# EAGLE board Qwiic_I2C_Capacitor-Panel (EAGLE 9.4.2), part 1 of 2
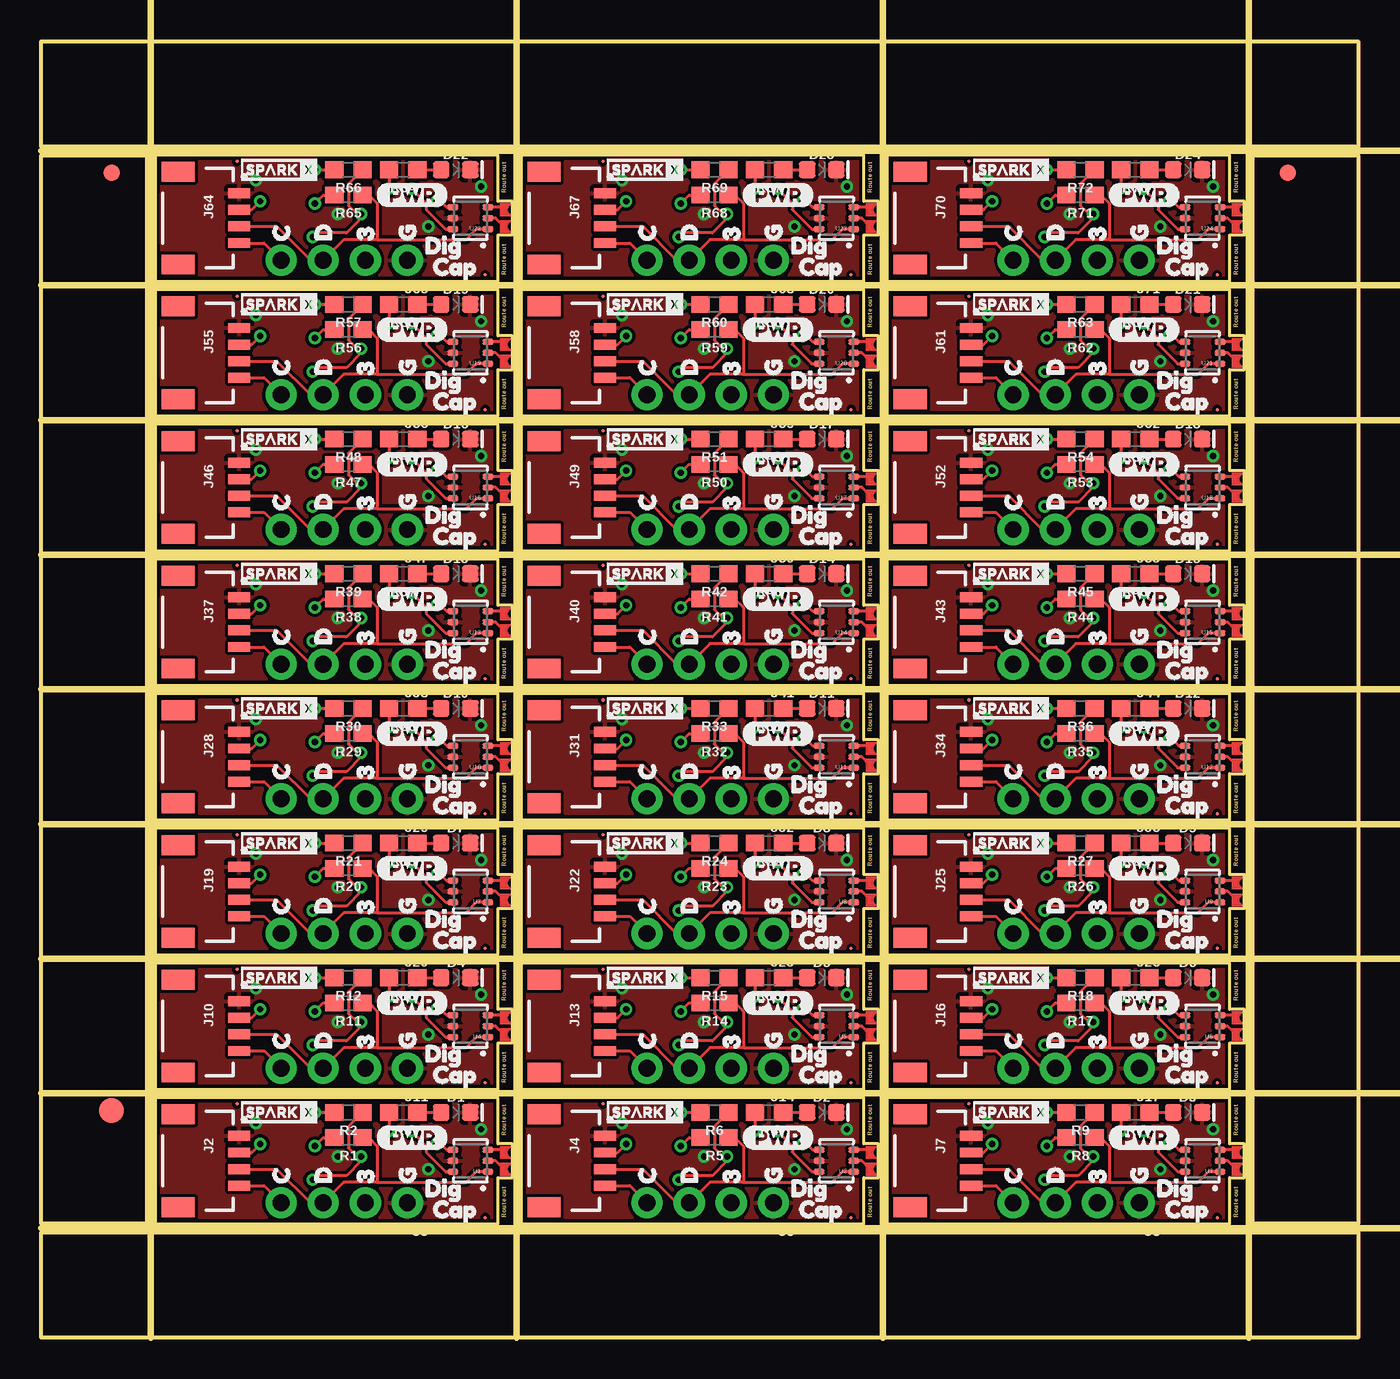
[diagram p0: board, top side]
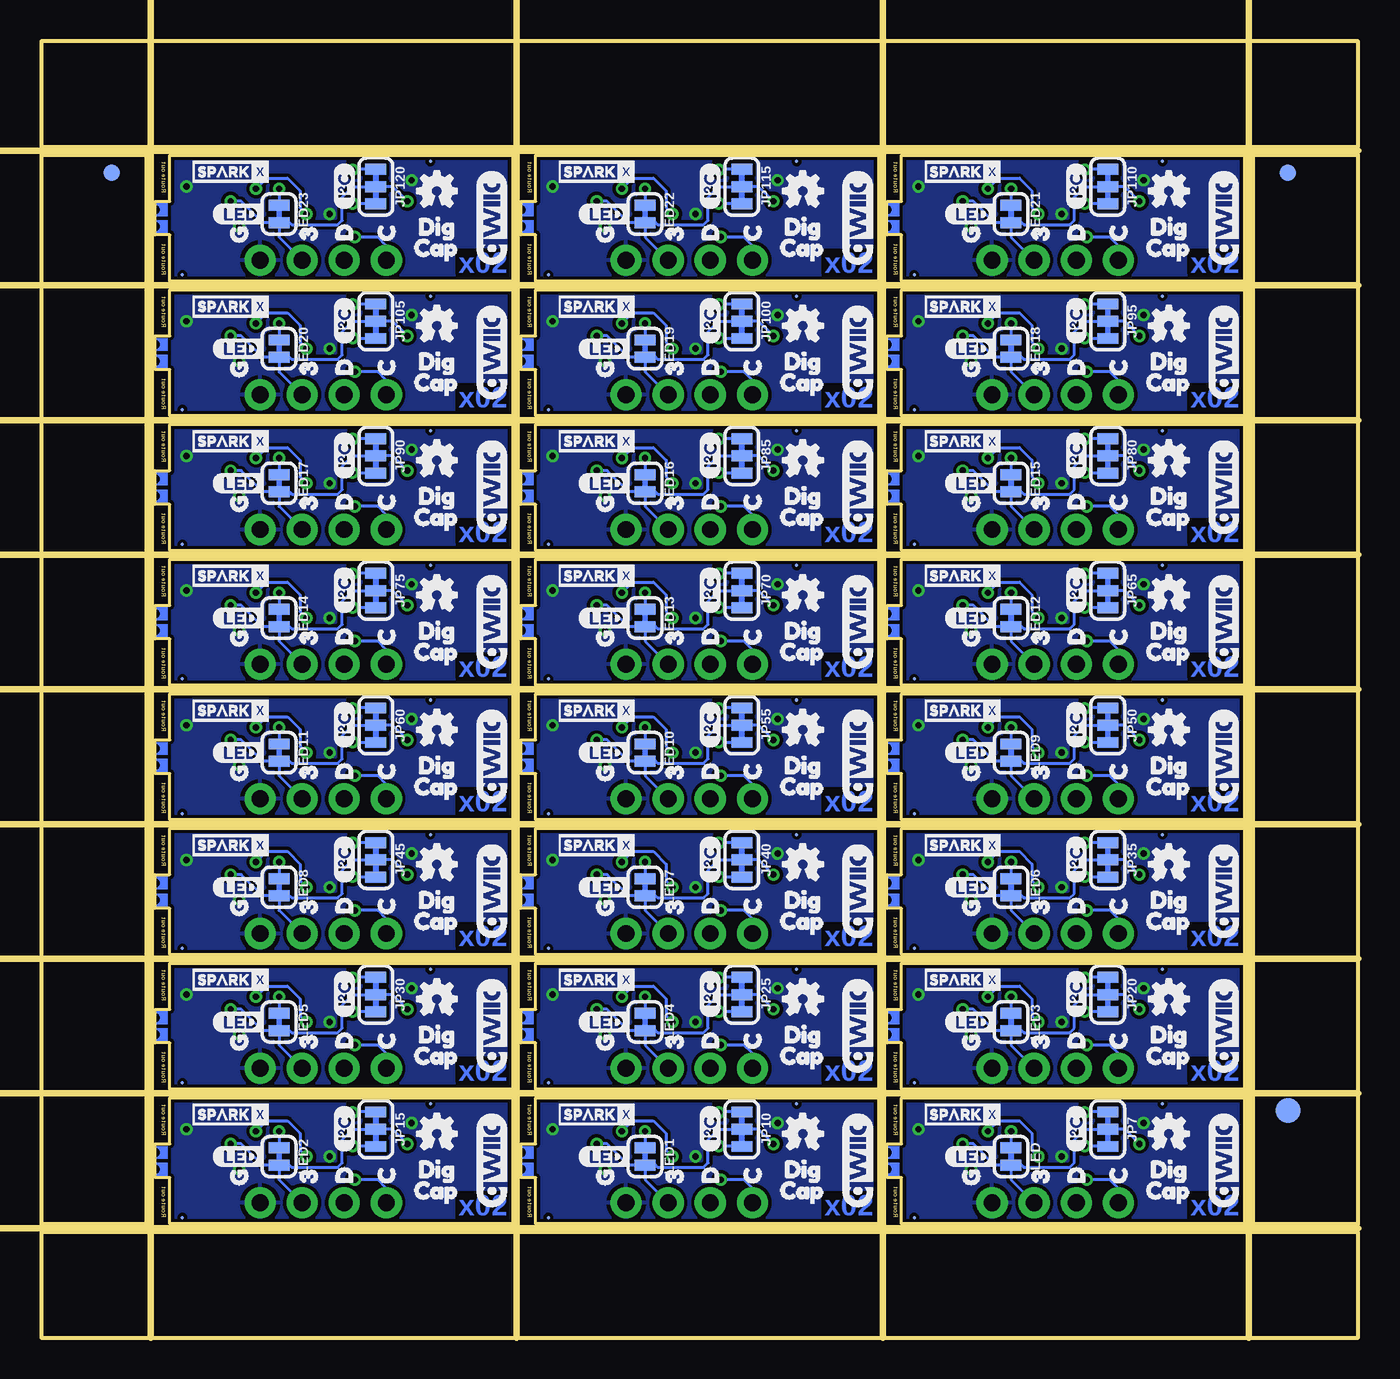
[diagram p1: board, bottom side, seen from below]

Size 79.5 x 78.23 mm. Coordinates in mm from the lower left corner, seen from the top.
Outline: 6.86,6.86 27.56,6.86 27.56,9.65 28.45,9.65 28.45,11.68 27.56,11.68 27.56,14.48 6.86,14.48 6.86,6.86
Outline: 28.96,6.86 49.66,6.86 49.66,9.65 50.55,9.65 50.55,11.68 49.66,11.68 49.66,14.48 28.96,14.48 28.96,6.86
Outline: 51.05,6.86 71.76,6.86 71.76,9.65 72.64,9.65 72.64,11.68 71.76,11.68 71.76,14.48 51.05,14.48 51.05,6.86
Outline: 6.86,14.99 27.56,14.99 27.56,17.78 28.45,17.78 28.45,19.81 27.56,19.81 27.56,22.61 6.86,22.61 6.86,14.99
Outline: 28.96,14.99 49.66,14.99 49.66,17.78 50.55,17.78 50.55,19.81 49.66,19.81 49.66,22.61 28.96,22.61 28.96,14.99
Outline: 51.05,14.99 71.76,14.99 71.76,17.78 72.64,17.78 72.64,19.81 71.76,19.81 71.76,22.61 51.05,22.61 51.05,14.99
Outline: 6.86,23.11 27.56,23.11 27.56,25.91 28.45,25.91 28.45,27.94 27.56,27.94 27.56,30.73 6.86,30.73 6.86,23.11
Outline: 28.96,23.11 49.66,23.11 49.66,25.91 50.55,25.91 50.55,27.94 49.66,27.94 49.66,30.73 28.96,30.73 28.96,23.11
Outline: 51.05,23.11 71.76,23.11 71.76,25.91 72.64,25.91 72.64,27.94 71.76,27.94 71.76,30.73 51.05,30.73 51.05,23.11
Outline: 6.86,31.24 27.56,31.24 27.56,34.04 28.45,34.04 28.45,36.07 27.56,36.07 27.56,38.86 6.86,38.86 6.86,31.24
Outline: 28.96,31.24 49.66,31.24 49.66,34.04 50.55,34.04 50.55,36.07 49.66,36.07 49.66,38.86 28.96,38.86 28.96,31.24
Outline: 51.05,31.24 71.76,31.24 71.76,34.04 72.64,34.04 72.64,36.07 71.76,36.07 71.76,38.86 51.05,38.86 51.05,31.24
Outline: 6.86,39.37 27.56,39.37 27.56,42.16 28.45,42.16 28.45,44.2 27.56,44.2 27.56,46.99 6.86,46.99 6.86,39.37
Outline: 28.96,39.37 49.66,39.37 49.66,42.16 50.55,42.16 50.55,44.2 49.66,44.2 49.66,46.99 28.96,46.99 28.96,39.37
Outline: 51.05,39.37 71.76,39.37 71.76,42.16 72.64,42.16 72.64,44.2 71.76,44.2 71.76,46.99 51.05,46.99 51.05,39.37
Outline: 6.86,47.5 27.56,47.5 27.56,50.29 28.45,50.29 28.45,52.32 27.56,52.32 27.56,55.12 6.86,55.12 6.86,47.5
Outline: 28.96,47.5 49.66,47.5 49.66,50.29 50.55,50.29 50.55,52.32 49.66,52.32 49.66,55.12 28.96,55.12 28.96,47.5
Outline: 51.05,47.5 71.76,47.5 71.76,50.29 72.64,50.29 72.64,52.32 71.76,52.32 71.76,55.12 51.05,55.12 51.05,47.5
Outline: 6.86,55.63 27.56,55.63 27.56,58.42 28.45,58.42 28.45,60.45 27.56,60.45 27.56,63.25 6.86,63.25 6.86,55.63
Outline: 28.96,55.63 49.66,55.63 49.66,58.42 50.55,58.42 50.55,60.45 49.66,60.45 49.66,63.25 28.96,63.25 28.96,55.63
Outline: 51.05,55.63 71.76,55.63 71.76,58.42 72.64,58.42 72.64,60.45 71.76,60.45 71.76,63.25 51.05,63.25 51.05,55.63
Outline: 6.86,63.75 27.56,63.75 27.56,66.55 28.45,66.55 28.45,68.58 27.56,68.58 27.56,71.37 6.86,71.37 6.86,63.75
Outline: 28.96,63.75 49.66,63.75 49.66,66.55 50.55,66.55 50.55,68.58 49.66,68.58 49.66,71.37 28.96,71.37 28.96,63.75
Outline: 51.05,63.75 71.76,63.75 71.76,66.55 72.64,66.55 72.64,68.58 71.76,68.58 71.76,71.37 51.05,71.37 51.05,63.75
Outline: 0,6.35 79.5,6.35 79.5,0 0,0 0,6.35
Outline: 73.15,71.37 79.5,71.37 79.5,6.86 73.15,6.86 73.15,71.37
Outline: 0,78.23 79.5,78.23 79.5,71.88 0,71.88 0,78.23
Outline: 0,71.37 6.35,71.37 6.35,6.86 0,6.86 0,71.37
Copper layers (1*16): Top 0.035mm / dielectric 1.5mm / Bottom 0.035mm
Design rules "Qwiic_I2C_Capacitor": minimum track width 7mil, minimum drill 15mil, track to track 7mil, track to pad 7mil, pad to pad 7mil, via to via 7mil, smd to smd 7mil, copper to edge 7mil, drill to drill 7mil, minimum pad ring 0mil, minimum via ring 7mil, stop-mask expansion 4mil, vias tented up to drill 25mil, thermal gap 10mil
Milling: 13 lines

## Footprints (pad centres in the part's own frame; a part is rotated, then mirrored left to right if it is on the bottom)
LED-0603 = smd 1 x 1: A -0.877,0; C 0.877,0
FIDUCIAL-1X2 = smd 1 x 1: 1 0,0
FIDUCIAL-1.5X3 = smd 1.5 x 1.5: 1 0,0
0603_CASTELLATED = drill 0.559 pad 0.559: 1 -0.508,0; 2 0.508,0
JST04_1MM_RA = smd 0.6 x 1.35: 1 -1.5,0; 2 -0.5,0; 3 0.5,0; 4 1.5,0 | smd 1.2 x 2: NC1 2.8,-3.675; NC2 -2.8,-3.675
1X04_NO_SILK = drill 1.016 pad 1.88: 1 0,0; 2 2.54,0; 3 5.08,0; 4 7.62,0
FIDUCIAL-0.2MM = smd 0.2 x 0.2: 1 0,0
SMT-JUMPER_3_2-NC_TRACE_SILK = smd 0.66 x 1.27: 1 -1.041,0; 2 0,0; 3 1.041,0
SMT-JUMPER_2_NC_TRACE_SILK = smd 0.66 x 1.27: 1 -0.521,0; 2 0.521,0
0603 = smd 1.1 x 1: 1 -0.85,0; 2 0.85,0
DFN6 = smd 0.66 x 0.356: 1 -1.054,0.66; 2 -1.054,0; 3 -1.054,-0.66; 4 1.054,-0.66; 5 1.054,0; 6 1.054,0.66

## Placement (x,y rotation side)
D1  RED  [LED-0603]  25.02,13.59 0 top
D2  RED  [LED-0603]  47.12,13.59 0 top
D3  RED  [LED-0603]  69.22,13.59 0 top
D4  RED  [LED-0603]  25.02,21.72 0 top
D5  RED  [LED-0603]  47.12,21.72 0 top
D6  RED  [LED-0603]  69.22,21.72 0 top
D7  RED  [LED-0603]  25.02,29.84 0 top
D8  RED  [LED-0603]  47.12,29.84 0 top
D9  RED  [LED-0603]  69.22,29.84 0 top
D10  RED  [LED-0603]  25.02,37.97 0 top
D11  RED  [LED-0603]  47.12,37.97 0 top
D12  RED  [LED-0603]  69.22,37.97 0 top
D13  RED  [LED-0603]  25.02,46.1 0 top
D14  RED  [LED-0603]  47.12,46.1 0 top
D15  RED  [LED-0603]  69.22,46.1 0 top
D16  RED  [LED-0603]  25.02,54.23 0 top
D17  RED  [LED-0603]  47.12,54.23 0 top
D18  RED  [LED-0603]  69.22,54.23 0 top
D19  RED  [LED-0603]  25.02,62.36 0 top
D20  RED  [LED-0603]  47.12,62.36 0 top
D21  RED  [LED-0603]  69.22,62.36 0 top
D22  RED  [LED-0603]  25.02,70.48 0 top
D23  RED  [LED-0603]  47.12,70.48 0 top
D24  RED  [LED-0603]  69.22,70.48 0 top
E$1  [FIDUCIAL-1X2]  4.23,70.29 0 top
E$2  [FIDUCIAL-1X2]  4.23,70.29 0 bottom
E$3  [FIDUCIAL-1X2]  75.27,70.29 0 top
E$4  [FIDUCIAL-1X2]  75.27,70.29 0 bottom
E$5  [FIDUCIAL-1.5X3]  4.23,13.72 0 top
E$6  [FIDUCIAL-1.5X3]  4.23,13.72 0 bottom
J1  CONN_02_0603  [0603_CASTELLATED]  28.45,10.67 90 top
J2  QWIIC_RIGHT_ANGLE  [JST04_1MM_RA]  11.94,10.67 270 top
J3  PTH  [1X04_NO_SILK]  22.1,8.13 180 top
J4  QWIIC_RIGHT_ANGLE  [JST04_1MM_RA]  34.04,10.67 270 top
J5  PTH  [1X04_NO_SILK]  44.2,8.13 180 top
J6  CONN_02_0603  [0603_CASTELLATED]  50.55,10.67 90 top
J7  QWIIC_RIGHT_ANGLE  [JST04_1MM_RA]  56.13,10.67 270 top
J8  PTH  [1X04_NO_SILK]  66.29,8.13 180 top
J9  CONN_02_0603  [0603_CASTELLATED]  72.64,10.67 90 top
J10  QWIIC_RIGHT_ANGLE  [JST04_1MM_RA]  11.94,18.8 270 top
J11  PTH  [1X04_NO_SILK]  22.1,16.26 180 top
J12  CONN_02_0603  [0603_CASTELLATED]  28.45,18.8 90 top
J13  QWIIC_RIGHT_ANGLE  [JST04_1MM_RA]  34.04,18.8 270 top
J14  PTH  [1X04_NO_SILK]  44.2,16.26 180 top
J15  CONN_02_0603  [0603_CASTELLATED]  50.55,18.8 90 top
J16  QWIIC_RIGHT_ANGLE  [JST04_1MM_RA]  56.13,18.8 270 top
J17  PTH  [1X04_NO_SILK]  66.29,16.26 180 top
J18  CONN_02_0603  [0603_CASTELLATED]  72.64,18.8 90 top
J19  QWIIC_RIGHT_ANGLE  [JST04_1MM_RA]  11.94,26.92 270 top
J20  PTH  [1X04_NO_SILK]  22.1,24.38 180 top
J21  CONN_02_0603  [0603_CASTELLATED]  28.45,26.92 90 top
J22  QWIIC_RIGHT_ANGLE  [JST04_1MM_RA]  34.04,26.92 270 top
J23  PTH  [1X04_NO_SILK]  44.2,24.38 180 top
J24  CONN_02_0603  [0603_CASTELLATED]  50.55,26.92 90 top
J25  QWIIC_RIGHT_ANGLE  [JST04_1MM_RA]  56.13,26.92 270 top
J26  PTH  [1X04_NO_SILK]  66.29,24.38 180 top
J27  CONN_02_0603  [0603_CASTELLATED]  72.64,26.92 90 top
J28  QWIIC_RIGHT_ANGLE  [JST04_1MM_RA]  11.94,35.05 270 top
J29  PTH  [1X04_NO_SILK]  22.1,32.51 180 top
J30  CONN_02_0603  [0603_CASTELLATED]  28.45,35.05 90 top
J31  QWIIC_RIGHT_ANGLE  [JST04_1MM_RA]  34.04,35.05 270 top
J32  PTH  [1X04_NO_SILK]  44.2,32.51 180 top
J33  CONN_02_0603  [0603_CASTELLATED]  50.55,35.05 90 top
J34  QWIIC_RIGHT_ANGLE  [JST04_1MM_RA]  56.13,35.05 270 top
J35  PTH  [1X04_NO_SILK]  66.29,32.51 180 top
J36  CONN_02_0603  [0603_CASTELLATED]  72.64,35.05 90 top
J37  QWIIC_RIGHT_ANGLE  [JST04_1MM_RA]  11.94,43.18 270 top
J38  PTH  [1X04_NO_SILK]  22.1,40.64 180 top
J39  CONN_02_0603  [0603_CASTELLATED]  28.45,43.18 90 top
J40  QWIIC_RIGHT_ANGLE  [JST04_1MM_RA]  34.04,43.18 270 top
J41  PTH  [1X04_NO_SILK]  44.2,40.64 180 top
J42  CONN_02_0603  [0603_CASTELLATED]  50.55,43.18 90 top
J43  QWIIC_RIGHT_ANGLE  [JST04_1MM_RA]  56.13,43.18 270 top
J44  PTH  [1X04_NO_SILK]  66.29,40.64 180 top
J45  CONN_02_0603  [0603_CASTELLATED]  72.64,43.18 90 top
J46  QWIIC_RIGHT_ANGLE  [JST04_1MM_RA]  11.94,51.31 270 top
J47  PTH  [1X04_NO_SILK]  22.1,48.77 180 top
J48  CONN_02_0603  [0603_CASTELLATED]  28.45,51.31 90 top
J49  QWIIC_RIGHT_ANGLE  [JST04_1MM_RA]  34.04,51.31 270 top
J50  PTH  [1X04_NO_SILK]  44.2,48.77 180 top
J51  CONN_02_0603  [0603_CASTELLATED]  50.55,51.31 90 top
J52  QWIIC_RIGHT_ANGLE  [JST04_1MM_RA]  56.13,51.31 270 top
J53  PTH  [1X04_NO_SILK]  66.29,48.77 180 top
J54  CONN_02_0603  [0603_CASTELLATED]  72.64,51.31 90 top
J55  QWIIC_RIGHT_ANGLE  [JST04_1MM_RA]  11.94,59.44 270 top
J56  PTH  [1X04_NO_SILK]  22.1,56.9 180 top
J57  CONN_02_0603  [0603_CASTELLATED]  28.45,59.44 90 top
J58  QWIIC_RIGHT_ANGLE  [JST04_1MM_RA]  34.04,59.44 270 top
J59  PTH  [1X04_NO_SILK]  44.2,56.9 180 top
J60  CONN_02_0603  [0603_CASTELLATED]  50.55,59.44 90 top
J61  QWIIC_RIGHT_ANGLE  [JST04_1MM_RA]  56.13,59.44 270 top
J62  PTH  [1X04_NO_SILK]  66.29,56.9 180 top
J63  CONN_02_0603  [0603_CASTELLATED]  72.64,59.44 90 top
J64  QWIIC_RIGHT_ANGLE  [JST04_1MM_RA]  11.94,67.56 270 top
J65  PTH  [1X04_NO_SILK]  22.1,65.02 180 top
J66  CONN_02_0603  [0603_CASTELLATED]  28.45,67.56 90 top
J67  QWIIC_RIGHT_ANGLE  [JST04_1MM_RA]  34.04,67.56 270 top
J68  PTH  [1X04_NO_SILK]  44.2,65.02 180 top
J69  CONN_02_0603  [0603_CASTELLATED]  50.55,67.56 90 top
J70  QWIIC_RIGHT_ANGLE  [JST04_1MM_RA]  56.13,67.56 270 top
J71  PTH  [1X04_NO_SILK]  66.29,65.02 180 top
J72  CONN_02_0603  [0603_CASTELLATED]  72.64,67.56 90 top
JP1  FIDUCIAL0.2MM  [FIDUCIAL-0.2MM]  11.81,14.1 0 bottom
JP2  FIDUCIAL0.2MM  [FIDUCIAL-0.2MM]  26.8,7.24 0 top
JP3  FIDUCIAL0.2MM  [FIDUCIAL-0.2MM]  48.89,7.24 0 top
JP4  FIDUCIAL0.2MM  [FIDUCIAL-0.2MM]  33.91,14.1 0 top
JP5  FIDUCIAL0.2MM  [FIDUCIAL-0.2MM]  26.8,7.24 0 bottom
JP6  FIDUCIAL0.2MM  [FIDUCIAL-0.2MM]  11.81,14.1 0 top
JP7  JUMPER-SMT_3_2-NC_TRACE_SILK  [SMT-JUMPER_3_2-NC_TRACE_SILK]  15.11,12.57 270 bottom
JP8  FIDUCIAL0.2MM  [FIDUCIAL-0.2MM]  33.91,14.1 0 bottom
JP9  FIDUCIAL0.2MM  [FIDUCIAL-0.2MM]  48.89,7.24 0 bottom
JP10  JUMPER-SMT_3_2-NC_TRACE_SILK  [SMT-JUMPER_3_2-NC_TRACE_SILK]  37.21,12.57 270 bottom
JP11  FIDUCIAL0.2MM  [FIDUCIAL-0.2MM]  70.99,7.24 0 top
JP12  FIDUCIAL0.2MM  [FIDUCIAL-0.2MM]  56.01,14.1 0 top
JP13  FIDUCIAL0.2MM  [FIDUCIAL-0.2MM]  56.01,14.1 0 bottom
JP14  FIDUCIAL0.2MM  [FIDUCIAL-0.2MM]  70.99,7.24 0 bottom
JP15  JUMPER-SMT_3_2-NC_TRACE_SILK  [SMT-JUMPER_3_2-NC_TRACE_SILK]  59.31,12.57 270 bottom
JP16  FIDUCIAL0.2MM  [FIDUCIAL-0.2MM]  26.8,15.37 0 top
JP17  FIDUCIAL0.2MM  [FIDUCIAL-0.2MM]  11.81,22.23 0 top
JP18  FIDUCIAL0.2MM  [FIDUCIAL-0.2MM]  11.81,22.23 0 bottom
JP19  FIDUCIAL0.2MM  [FIDUCIAL-0.2MM]  26.8,15.37 0 bottom
JP20  JUMPER-SMT_3_2-NC_TRACE_SILK  [SMT-JUMPER_3_2-NC_TRACE_SILK]  15.11,20.7 270 bottom
JP21  FIDUCIAL0.2MM  [FIDUCIAL-0.2MM]  48.89,15.37 0 top
JP22  FIDUCIAL0.2MM  [FIDUCIAL-0.2MM]  33.91,22.23 0 top
JP23  FIDUCIAL0.2MM  [FIDUCIAL-0.2MM]  33.91,22.23 0 bottom
JP24  FIDUCIAL0.2MM  [FIDUCIAL-0.2MM]  48.89,15.37 0 bottom
JP25  JUMPER-SMT_3_2-NC_TRACE_SILK  [SMT-JUMPER_3_2-NC_TRACE_SILK]  37.21,20.7 270 bottom
JP26  FIDUCIAL0.2MM  [FIDUCIAL-0.2MM]  70.99,15.37 0 top
JP27  FIDUCIAL0.2MM  [FIDUCIAL-0.2MM]  56.01,22.23 0 top
JP28  FIDUCIAL0.2MM  [FIDUCIAL-0.2MM]  56.01,22.23 0 bottom
JP29  FIDUCIAL0.2MM  [FIDUCIAL-0.2MM]  70.99,15.37 0 bottom
JP30  JUMPER-SMT_3_2-NC_TRACE_SILK  [SMT-JUMPER_3_2-NC_TRACE_SILK]  59.31,20.7 270 bottom
JP31  FIDUCIAL0.2MM  [FIDUCIAL-0.2MM]  26.8,23.5 0 top
JP32  FIDUCIAL0.2MM  [FIDUCIAL-0.2MM]  11.81,30.35 0 top
JP33  FIDUCIAL0.2MM  [FIDUCIAL-0.2MM]  11.81,30.35 0 bottom
JP34  FIDUCIAL0.2MM  [FIDUCIAL-0.2MM]  26.8,23.5 0 bottom
JP35  JUMPER-SMT_3_2-NC_TRACE_SILK  [SMT-JUMPER_3_2-NC_TRACE_SILK]  15.11,28.83 270 bottom
JP36  FIDUCIAL0.2MM  [FIDUCIAL-0.2MM]  48.89,23.5 0 top
JP37  FIDUCIAL0.2MM  [FIDUCIAL-0.2MM]  33.91,30.35 0 top
JP38  FIDUCIAL0.2MM  [FIDUCIAL-0.2MM]  33.91,30.35 0 bottom
JP39  FIDUCIAL0.2MM  [FIDUCIAL-0.2MM]  48.89,23.5 0 bottom
JP40  JUMPER-SMT_3_2-NC_TRACE_SILK  [SMT-JUMPER_3_2-NC_TRACE_SILK]  37.21,28.83 270 bottom
JP41  FIDUCIAL0.2MM  [FIDUCIAL-0.2MM]  70.99,23.5 0 top
JP42  FIDUCIAL0.2MM  [FIDUCIAL-0.2MM]  56.01,30.35 0 top
JP43  FIDUCIAL0.2MM  [FIDUCIAL-0.2MM]  56.01,30.35 0 bottom
JP44  FIDUCIAL0.2MM  [FIDUCIAL-0.2MM]  70.99,23.5 0 bottom
JP45  JUMPER-SMT_3_2-NC_TRACE_SILK  [SMT-JUMPER_3_2-NC_TRACE_SILK]  59.31,28.83 270 bottom
JP46  FIDUCIAL0.2MM  [FIDUCIAL-0.2MM]  26.8,31.62 0 top
JP47  FIDUCIAL0.2MM  [FIDUCIAL-0.2MM]  11.81,38.48 0 top
JP48  FIDUCIAL0.2MM  [FIDUCIAL-0.2MM]  11.81,38.48 0 bottom
JP49  FIDUCIAL0.2MM  [FIDUCIAL-0.2MM]  26.8,31.62 0 bottom
JP50  JUMPER-SMT_3_2-NC_TRACE_SILK  [SMT-JUMPER_3_2-NC_TRACE_SILK]  15.11,36.96 270 bottom
JP51  FIDUCIAL0.2MM  [FIDUCIAL-0.2MM]  48.89,31.62 0 top
JP52  FIDUCIAL0.2MM  [FIDUCIAL-0.2MM]  33.91,38.48 0 top
JP53  FIDUCIAL0.2MM  [FIDUCIAL-0.2MM]  33.91,38.48 0 bottom
JP54  FIDUCIAL0.2MM  [FIDUCIAL-0.2MM]  48.89,31.62 0 bottom
JP55  JUMPER-SMT_3_2-NC_TRACE_SILK  [SMT-JUMPER_3_2-NC_TRACE_SILK]  37.21,36.96 270 bottom
JP56  FIDUCIAL0.2MM  [FIDUCIAL-0.2MM]  70.99,31.62 0 top
JP57  FIDUCIAL0.2MM  [FIDUCIAL-0.2MM]  56.01,38.48 0 top
JP58  FIDUCIAL0.2MM  [FIDUCIAL-0.2MM]  56.01,38.48 0 bottom
JP59  FIDUCIAL0.2MM  [FIDUCIAL-0.2MM]  70.99,31.62 0 bottom
JP60  JUMPER-SMT_3_2-NC_TRACE_SILK  [SMT-JUMPER_3_2-NC_TRACE_SILK]  59.31,36.96 270 bottom
JP61  FIDUCIAL0.2MM  [FIDUCIAL-0.2MM]  26.8,39.75 0 top
JP62  FIDUCIAL0.2MM  [FIDUCIAL-0.2MM]  11.81,46.61 0 top
JP63  FIDUCIAL0.2MM  [FIDUCIAL-0.2MM]  11.81,46.61 0 bottom
JP64  FIDUCIAL0.2MM  [FIDUCIAL-0.2MM]  26.8,39.75 0 bottom
JP65  JUMPER-SMT_3_2-NC_TRACE_SILK  [SMT-JUMPER_3_2-NC_TRACE_SILK]  15.11,45.08 270 bottom
JP66  FIDUCIAL0.2MM  [FIDUCIAL-0.2MM]  48.89,39.75 0 top
JP67  FIDUCIAL0.2MM  [FIDUCIAL-0.2MM]  33.91,46.61 0 top
JP68  FIDUCIAL0.2MM  [FIDUCIAL-0.2MM]  33.91,46.61 0 bottom
JP69  FIDUCIAL0.2MM  [FIDUCIAL-0.2MM]  48.89,39.75 0 bottom
JP70  JUMPER-SMT_3_2-NC_TRACE_SILK  [SMT-JUMPER_3_2-NC_TRACE_SILK]  37.21,45.08 270 bottom
JP71  FIDUCIAL0.2MM  [FIDUCIAL-0.2MM]  70.99,39.75 0 top
JP72  FIDUCIAL0.2MM  [FIDUCIAL-0.2MM]  56.01,46.61 0 top
JP73  FIDUCIAL0.2MM  [FIDUCIAL-0.2MM]  56.01,46.61 0 bottom
JP74  FIDUCIAL0.2MM  [FIDUCIAL-0.2MM]  70.99,39.75 0 bottom
JP75  JUMPER-SMT_3_2-NC_TRACE_SILK  [SMT-JUMPER_3_2-NC_TRACE_SILK]  59.31,45.08 270 bottom
JP76  FIDUCIAL0.2MM  [FIDUCIAL-0.2MM]  26.8,47.88 0 top
JP77  FIDUCIAL0.2MM  [FIDUCIAL-0.2MM]  11.81,54.74 0 top
JP78  FIDUCIAL0.2MM  [FIDUCIAL-0.2MM]  11.81,54.74 0 bottom
JP79  FIDUCIAL0.2MM  [FIDUCIAL-0.2MM]  26.8,47.88 0 bottom
JP80  JUMPER-SMT_3_2-NC_TRACE_SILK  [SMT-JUMPER_3_2-NC_TRACE_SILK]  15.11,53.21 270 bottom
JP81  FIDUCIAL0.2MM  [FIDUCIAL-0.2MM]  48.89,47.88 0 top
JP82  FIDUCIAL0.2MM  [FIDUCIAL-0.2MM]  33.91,54.74 0 top
JP83  FIDUCIAL0.2MM  [FIDUCIAL-0.2MM]  33.91,54.74 0 bottom
JP84  FIDUCIAL0.2MM  [FIDUCIAL-0.2MM]  48.89,47.88 0 bottom
JP85  JUMPER-SMT_3_2-NC_TRACE_SILK  [SMT-JUMPER_3_2-NC_TRACE_SILK]  37.21,53.21 270 bottom
JP86  FIDUCIAL0.2MM  [FIDUCIAL-0.2MM]  70.99,47.88 0 top
JP87  FIDUCIAL0.2MM  [FIDUCIAL-0.2MM]  56.01,54.74 0 top
JP88  FIDUCIAL0.2MM  [FIDUCIAL-0.2MM]  56.01,54.74 0 bottom
JP89  FIDUCIAL0.2MM  [FIDUCIAL-0.2MM]  70.99,47.88 0 bottom
JP90  JUMPER-SMT_3_2-NC_TRACE_SILK  [SMT-JUMPER_3_2-NC_TRACE_SILK]  59.31,53.21 270 bottom
JP91  FIDUCIAL0.2MM  [FIDUCIAL-0.2MM]  26.8,56.01 0 top
JP92  FIDUCIAL0.2MM  [FIDUCIAL-0.2MM]  11.81,62.86 0 top
JP93  FIDUCIAL0.2MM  [FIDUCIAL-0.2MM]  11.81,62.86 0 bottom
JP94  FIDUCIAL0.2MM  [FIDUCIAL-0.2MM]  26.8,56.01 0 bottom
JP95  JUMPER-SMT_3_2-NC_TRACE_SILK  [SMT-JUMPER_3_2-NC_TRACE_SILK]  15.11,61.34 270 bottom
JP96  FIDUCIAL0.2MM  [FIDUCIAL-0.2MM]  48.89,56.01 0 top
JP97  FIDUCIAL0.2MM  [FIDUCIAL-0.2MM]  33.91,62.86 0 top
JP98  FIDUCIAL0.2MM  [FIDUCIAL-0.2MM]  33.91,62.86 0 bottom
JP99  FIDUCIAL0.2MM  [FIDUCIAL-0.2MM]  48.89,56.01 0 bottom
JP100  JUMPER-SMT_3_2-NC_TRACE_SILK  [SMT-JUMPER_3_2-NC_TRACE_SILK]  37.21,61.34 270 bottom
JP101  FIDUCIAL0.2MM  [FIDUCIAL-0.2MM]  70.99,56.01 0 top
JP102  FIDUCIAL0.2MM  [FIDUCIAL-0.2MM]  56.01,62.86 0 top
JP103  FIDUCIAL0.2MM  [FIDUCIAL-0.2MM]  56.01,62.86 0 bottom
JP104  FIDUCIAL0.2MM  [FIDUCIAL-0.2MM]  70.99,56.01 0 bottom
JP105  JUMPER-SMT_3_2-NC_TRACE_SILK  [SMT-JUMPER_3_2-NC_TRACE_SILK]  59.31,61.34 270 bottom
JP106  FIDUCIAL0.2MM  [FIDUCIAL-0.2MM]  26.8,64.14 0 top
JP107  FIDUCIAL0.2MM  [FIDUCIAL-0.2MM]  11.81,70.99 0 top
JP108  FIDUCIAL0.2MM  [FIDUCIAL-0.2MM]  11.81,70.99 0 bottom
JP109  FIDUCIAL0.2MM  [FIDUCIAL-0.2MM]  26.8,64.14 0 bottom
JP110  JUMPER-SMT_3_2-NC_TRACE_SILK  [SMT-JUMPER_3_2-NC_TRACE_SILK]  15.11,69.47 270 bottom
JP111  FIDUCIAL0.2MM  [FIDUCIAL-0.2MM]  48.89,64.14 0 top
JP112  FIDUCIAL0.2MM  [FIDUCIAL-0.2MM]  33.91,70.99 0 top
JP113  FIDUCIAL0.2MM  [FIDUCIAL-0.2MM]  33.91,70.99 0 bottom
JP114  FIDUCIAL0.2MM  [FIDUCIAL-0.2MM]  48.89,64.14 0 bottom
JP115  JUMPER-SMT_3_2-NC_TRACE_SILK  [SMT-JUMPER_3_2-NC_TRACE_SILK]  37.21,69.47 270 bottom
JP116  FIDUCIAL0.2MM  [FIDUCIAL-0.2MM]  70.99,64.14 0 top
JP117  FIDUCIAL0.2MM  [FIDUCIAL-0.2MM]  56.01,70.99 0 top
JP118  FIDUCIAL0.2MM  [FIDUCIAL-0.2MM]  56.01,70.99 0 bottom
JP119  FIDUCIAL0.2MM  [FIDUCIAL-0.2MM]  70.99,64.14 0 bottom
JP120  JUMPER-SMT_3_2-NC_TRACE_SILK  [SMT-JUMPER_3_2-NC_TRACE_SILK]  59.31,69.47 270 bottom
LED  JUMPER-SMT_2_NC_TRACE_SILK  [SMT-JUMPER_2_NC_TRACE_SILK]  20.95,10.92 270 bottom
LED1  JUMPER-SMT_2_NC_TRACE_SILK  [SMT-JUMPER_2_NC_TRACE_SILK]  43.05,10.92 270 bottom
LED2  JUMPER-SMT_2_NC_TRACE_SILK  [SMT-JUMPER_2_NC_TRACE_SILK]  65.15,10.92 270 bottom
LED3  JUMPER-SMT_2_NC_TRACE_SILK  [SMT-JUMPER_2_NC_TRACE_SILK]  20.95,19.05 270 bottom
LED4  JUMPER-SMT_2_NC_TRACE_SILK  [SMT-JUMPER_2_NC_TRACE_SILK]  43.05,19.05 270 bottom
LED5  JUMPER-SMT_2_NC_TRACE_SILK  [SMT-JUMPER_2_NC_TRACE_SILK]  65.15,19.05 270 bottom
LED6  JUMPER-SMT_2_NC_TRACE_SILK  [SMT-JUMPER_2_NC_TRACE_SILK]  20.95,27.18 270 bottom
LED7  JUMPER-SMT_2_NC_TRACE_SILK  [SMT-JUMPER_2_NC_TRACE_SILK]  43.05,27.18 270 bottom
LED8  JUMPER-SMT_2_NC_TRACE_SILK  [SMT-JUMPER_2_NC_TRACE_SILK]  65.15,27.18 270 bottom
LED9  JUMPER-SMT_2_NC_TRACE_SILK  [SMT-JUMPER_2_NC_TRACE_SILK]  20.95,35.31 270 bottom
LED10  JUMPER-SMT_2_NC_TRACE_SILK  [SMT-JUMPER_2_NC_TRACE_SILK]  43.05,35.31 270 bottom
LED11  JUMPER-SMT_2_NC_TRACE_SILK  [SMT-JUMPER_2_NC_TRACE_SILK]  65.15,35.31 270 bottom
LED12  JUMPER-SMT_2_NC_TRACE_SILK  [SMT-JUMPER_2_NC_TRACE_SILK]  20.95,43.43 270 bottom
LED13  JUMPER-SMT_2_NC_TRACE_SILK  [SMT-JUMPER_2_NC_TRACE_SILK]  43.05,43.43 270 bottom
LED14  JUMPER-SMT_2_NC_TRACE_SILK  [SMT-JUMPER_2_NC_TRACE_SILK]  65.15,43.43 270 bottom
LED15  JUMPER-SMT_2_NC_TRACE_SILK  [SMT-JUMPER_2_NC_TRACE_SILK]  20.95,51.56 270 bottom
LED16  JUMPER-SMT_2_NC_TRACE_SILK  [SMT-JUMPER_2_NC_TRACE_SILK]  43.05,51.56 270 bottom
LED17  JUMPER-SMT_2_NC_TRACE_SILK  [SMT-JUMPER_2_NC_TRACE_SILK]  65.15,51.56 270 bottom
LED18  JUMPER-SMT_2_NC_TRACE_SILK  [SMT-JUMPER_2_NC_TRACE_SILK]  20.95,59.69 270 bottom
LED19  JUMPER-SMT_2_NC_TRACE_SILK  [SMT-JUMPER_2_NC_TRACE_SILK]  43.05,59.69 270 bottom
LED20  JUMPER-SMT_2_NC_TRACE_SILK  [SMT-JUMPER_2_NC_TRACE_SILK]  65.15,59.69 270 bottom
LED21  JUMPER-SMT_2_NC_TRACE_SILK  [SMT-JUMPER_2_NC_TRACE_SILK]  20.95,67.82 270 bottom
LED22  JUMPER-SMT_2_NC_TRACE_SILK  [SMT-JUMPER_2_NC_TRACE_SILK]  43.05,67.82 270 bottom
LED23  JUMPER-SMT_2_NC_TRACE_SILK  [SMT-JUMPER_2_NC_TRACE_SILK]  65.15,67.82 270 bottom
LOGO1  OSHW-LOGOMINI  [OSHW-LOGO-MINI]  11.43,12.32 0 bottom
LOGO2  OSHW-LOGOMINI  [OSHW-LOGO-MINI]  33.53,12.32 0 bottom
LOGO3  OSHW-LOGOMINI  [OSHW-LOGO-MINI]  55.63,12.32 0 bottom
LOGO4  OSHW-LOGOMINI  [OSHW-LOGO-MINI]  11.43,20.45 0 bottom
LOGO5  OSHW-LOGOMINI  [OSHW-LOGO-MINI]  33.53,20.45 0 bottom
LOGO6  OSHW-LOGOMINI  [OSHW-LOGO-MINI]  55.63,20.45 0 bottom
LOGO7  OSHW-LOGOMINI  [OSHW-LOGO-MINI]  11.43,28.57 0 bottom
LOGO8  OSHW-LOGOMINI  [OSHW-LOGO-MINI]  33.53,28.57 0 bottom
LOGO9  OSHW-LOGOMINI  [OSHW-LOGO-MINI]  55.63,28.57 0 bottom
LOGO10  OSHW-LOGOMINI  [OSHW-LOGO-MINI]  11.43,36.7 0 bottom
LOGO11  OSHW-LOGOMINI  [OSHW-LOGO-MINI]  33.53,36.7 0 bottom
LOGO12  OSHW-LOGOMINI  [OSHW-LOGO-MINI]  55.63,36.7 0 bottom
LOGO13  OSHW-LOGOMINI  [OSHW-LOGO-MINI]  11.43,44.83 0 bottom
LOGO14  OSHW-LOGOMINI  [OSHW-LOGO-MINI]  33.53,44.83 0 bottom
LOGO15  OSHW-LOGOMINI  [OSHW-LOGO-MINI]  55.63,44.83 0 bottom
LOGO16  OSHW-LOGOMINI  [OSHW-LOGO-MINI]  11.43,52.96 0 bottom
LOGO17  OSHW-LOGOMINI  [OSHW-LOGO-MINI]  33.53,52.96 0 bottom
LOGO18  OSHW-LOGOMINI  [OSHW-LOGO-MINI]  55.63,52.96 0 bottom
LOGO19  OSHW-LOGOMINI  [OSHW-LOGO-MINI]  11.43,61.09 0 bottom
LOGO20  OSHW-LOGOMINI  [OSHW-LOGO-MINI]  33.53,61.09 0 bottom
LOGO21  OSHW-LOGOMINI  [OSHW-LOGO-MINI]  55.63,61.09 0 bottom
LOGO22  OSHW-LOGOMINI  [OSHW-LOGO-MINI]  11.43,69.22 0 bottom
LOGO23  OSHW-LOGOMINI  [OSHW-LOGO-MINI]  33.53,69.22 0 bottom
LOGO24  OSHW-LOGOMINI  [OSHW-LOGO-MINI]  55.63,69.22 0 bottom
R1  2.2k  [0603]  18.54,12.06 180 top
R2  2.2k  [0603]  18.54,13.59 180 top
R3  1k  [0603]  21.84,13.59 180 top
R4  1k  [0603]  43.94,13.59 180 top
R5  2.2k  [0603]  40.64,12.06 180 top
R6  2.2k  [0603]  40.64,13.59 180 top
R7  1k  [0603]  66.04,13.59 180 top
R8  2.2k  [0603]  62.74,12.06 180 top
R9  2.2k  [0603]  62.74,13.59 180 top
R10  1k  [0603]  21.84,21.72 180 top
R11  2.2k  [0603]  18.54,20.19 180 top
R12  2.2k  [0603]  18.54,21.72 180 top
R13  1k  [0603]  43.94,21.72 180 top
R14  2.2k  [0603]  40.64,20.19 180 top
R15  2.2k  [0603]  40.64,21.72 180 top
R16  1k  [0603]  66.04,21.72 180 top
R17  2.2k  [0603]  62.74,20.19 180 top
R18  2.2k  [0603]  62.74,21.72 180 top
R19  1k  [0603]  21.84,29.84 180 top
R20  2.2k  [0603]  18.54,28.32 180 top
R21  2.2k  [0603]  18.54,29.84 180 top
R22  1k  [0603]  43.94,29.84 180 top
R23  2.2k  [0603]  40.64,28.32 180 top
R24  2.2k  [0603]  40.64,29.84 180 top
R25  1k  [0603]  66.04,29.84 180 top
R26  2.2k  [0603]  62.74,28.32 180 top
R27  2.2k  [0603]  62.74,29.84 180 top
R28  1k  [0603]  21.84,37.97 180 top
R29  2.2k  [0603]  18.54,36.45 180 top
R30  2.2k  [0603]  18.54,37.97 180 top
R31  1k  [0603]  43.94,37.97 180 top
R32  2.2k  [0603]  40.64,36.45 180 top
R33  2.2k  [0603]  40.64,37.97 180 top
R34  1k  [0603]  66.04,37.97 180 top
R35  2.2k  [0603]  62.74,36.45 180 top
R36  2.2k  [0603]  62.74,37.97 180 top
R37  1k  [0603]  21.84,46.1 180 top
R38  2.2k  [0603]  18.54,44.58 180 top
R39  2.2k  [0603]  18.54,46.1 180 top
R40  1k  [0603]  43.94,46.1 180 top
R41  2.2k  [0603]  40.64,44.58 180 top
R42  2.2k  [0603]  40.64,46.1 180 top
R43  1k  [0603]  66.04,46.1 180 top
R44  2.2k  [0603]  62.74,44.58 180 top
R45  2.2k  [0603]  62.74,46.1 180 top
R46  1k  [0603]  21.84,54.23 180 top
R47  2.2k  [0603]  18.54,52.7 180 top
R48  2.2k  [0603]  18.54,54.23 180 top
R49  1k  [0603]  43.94,54.23 180 top
R50  2.2k  [0603]  40.64,52.7 180 top
R51  2.2k  [0603]  40.64,54.23 180 top
R52  1k  [0603]  66.04,54.23 180 top
R53  2.2k  [0603]  62.74,52.7 180 top
R54  2.2k  [0603]  62.74,54.23 180 top
R55  1k  [0603]  21.84,62.36 180 top
R56  2.2k  [0603]  18.54,60.83 180 top
R57  2.2k  [0603]  18.54,62.36 180 top
R58  1k  [0603]  43.94,62.36 180 top
R59  2.2k  [0603]  40.64,60.83 180 top
R60  2.2k  [0603]  40.64,62.36 180 top
R61  1k  [0603]  66.04,62.36 180 top
R62  2.2k  [0603]  62.74,60.83 180 top
R63  2.2k  [0603]  62.74,62.36 180 top
R64  1k  [0603]  21.84,70.48 180 top
R65  2.2k  [0603]  18.54,68.96 180 top
R66  2.2k  [0603]  18.54,70.48 180 top
R67  1k  [0603]  43.94,70.48 180 top
R68  2.2k  [0603]  40.64,68.96 180 top
R69  2.2k  [0603]  40.64,70.48 180 top
R70  1k  [0603]  66.04,70.48 180 top
R71  2.2k  [0603]  62.74,68.96 180 top
R72  2.2k  [0603]  62.74,70.48 180 top
U1  NCD2400MDFN  [DFN6]  25.91,10.67 180 top
U2  NCD2400MDFN  [DFN6]  48.01,10.67 180 top
U3  NCD2400MDFN  [DFN6]  70.1,10.67 180 top
U4  NCD2400MDFN  [DFN6]  25.91,18.8 180 top
U5  NCD2400MDFN  [DFN6]  48.01,18.8 180 top
U6  NCD2400MDFN  [DFN6]  70.1,18.8 180 top
U7  NCD2400MDFN  [DFN6]  25.91,26.92 180 top
U8  NCD2400MDFN  [DFN6]  48.01,26.92 180 top
U9  NCD2400MDFN  [DFN6]  70.1,26.92 180 top
U10  NCD2400MDFN  [DFN6]  25.91,35.05 180 top
U11  NCD2400MDFN  [DFN6]  48.01,35.05 180 top
U12  NCD2400MDFN  [DFN6]  70.1,35.05 180 top
U13  NCD2400MDFN  [DFN6]  25.91,43.18 180 top
U14  NCD2400MDFN  [DFN6]  48.01,43.18 180 top
U15  NCD2400MDFN  [DFN6]  70.1,43.18 180 top
U16  NCD2400MDFN  [DFN6]  25.91,51.31 180 top
U17  NCD2400MDFN  [DFN6]  48.01,51.31 180 top
U18  NCD2400MDFN  [DFN6]  70.1,51.31 180 top
U19  NCD2400MDFN  [DFN6]  25.91,59.44 180 top
U20  NCD2400MDFN  [DFN6]  48.01,59.44 180 top
U21  NCD2400MDFN  [DFN6]  70.1,59.44 180 top
U22  NCD2400MDFN  [DFN6]  25.91,67.56 180 top
U23  NCD2400MDFN  [DFN6]  48.01,67.56 180 top
U24  NCD2400MDFN  [DFN6]  70.1,67.56 180 top
U$1  [PWR2]  20.19,12.06 0 top
U$2  [I_SUPER2_C-()-03]  39.12,11.18 90 bottom
U$3  [32]  19.18,8.38 90 bottom
U$4  [C0]  14.48,8.38 90 bottom
U$5  [D1]  17.02,8.38 90 bottom
U$6  [G3]  23.37,8.25 90 bottom
U$7  [32]  19.56,8.38 90 top
U$8  [C0]  14.48,8.38 90 top
U$9  [I_SUPER2_C-()-03]  17.02,11.18 90 bottom
U$10  [32]  41.66,8.38 90 top
U$11  [CAP1]  22.73,7.75 0 top
U$12  [SPARKX-TINY]  14.35,13.59 0 top
U$13  [D1]  17.02,8.38 90 top
U$14  [G3]  22.1,8.38 90 top
U$15  [LED0]  25.02,10.92 0 bottom
U$16  [SPARKX-TINY]  23.88,13.46 0 bottom
U$17  [C0]  36.58,8.38 90 top
U$18  [CAP1]  13.72,8.89 0 bottom
U$19  [D1]  39.12,8.38 90 top
U$20  [QWIIC_COPYRIGHT_SMALL]  8.13,10.67 90 bottom
U$21  [QWIIC_COPYRIGHT_SMALL]  8.13,10.67 90 bottom
U$22  [DIG0]  22.23,9.02 0 top
U$23  [DIG0]  13.46,10.16 0 bottom
U$24  [G3]  44.2,8.38 90 top
U$25  [32]  41.27,8.38 90 bottom
U$26  [C0]  36.58,8.38 90 bottom
U$27  [D1]  39.12,8.38 90 bottom
U$28  [G3]  45.47,8.25 90 bottom
U$29  [LED0]  47.12,10.92 0 bottom
U$30  [SPARKX-TINY]  36.45,13.59 0 top
U$31  [SPARKX-TINY]  45.97,13.46 0 bottom
U$32  [QWIIC_COPYRIGHT_SMALL]  30.23,10.67 90 bottom
U$33  [QWIIC_COPYRIGHT_SMALL]  30.23,10.67 90 bottom
U$34  [CAP1]  44.83,7.75 0 top
U$35  [CAP1]  35.81,8.89 0 bottom
U$36  [DIG0]  44.32,9.02 0 top
U$37  [DIG0]  35.56,10.16 0 bottom
U$38  [PWR2]  42.29,12.06 0 top
U$39  [I_SUPER2_C-()-03]  61.21,11.18 90 bottom
U$40  [32]  63.75,8.38 90 top
U$41  [C0]  58.67,8.38 90 top
U$42  [D1]  61.21,8.38 90 top
U$43  [G3]  66.29,8.38 90 top
U$44  [32]  63.37,8.38 90 bottom
U$45  [C0]  58.67,8.38 90 bottom
U$46  [D1]  61.21,8.38 90 bottom
U$47  [G3]  67.56,8.25 90 bottom
U$48  [LED0]  69.22,10.92 0 bottom
U$49  [SPARKX-TINY]  58.55,13.59 0 top
U$50  [SPARKX-TINY]  68.07,13.46 0 bottom
U$51  [QWIIC_COPYRIGHT_SMALL]  52.32,10.67 90 bottom
U$52  [QWIIC_COPYRIGHT_SMALL]  52.32,10.67 90 bottom
U$53  [CAP1]  66.93,7.75 0 top
U$54  [CAP1]  57.91,8.89 0 bottom
U$55  [DIG0]  66.42,9.02 0 top
U$56  [DIG0]  57.66,10.16 0 bottom
U$57  [PWR2]  64.39,12.06 0 top
U$58  [I_SUPER2_C-()-03]  17.02,19.3 90 bottom
U$59  [32]  19.56,16.51 90 top
U$60  [C0]  14.48,16.51 90 top
U$61  [D1]  17.02,16.51 90 top
U$62  [G3]  22.1,16.51 90 top
U$63  [32]  19.18,16.51 90 bottom
U$64  [C0]  14.48,16.51 90 bottom
U$65  [D1]  17.02,16.51 90 bottom
U$66  [G3]  23.37,16.38 90 bottom
U$67  [LED0]  25.02,19.05 0 bottom
U$68  [SPARKX-TINY]  14.35,21.72 0 top
U$69  [SPARKX-TINY]  23.88,21.59 0 bottom
U$70  [QWIIC_COPYRIGHT_SMALL]  8.13,18.8 90 bottom
U$71  [QWIIC_COPYRIGHT_SMALL]  8.13,18.8 90 bottom
U$72  [CAP1]  22.73,15.88 0 top
U$73  [CAP1]  13.72,17.02 0 bottom
U$74  [DIG0]  22.23,17.14 0 top
U$75  [DIG0]  13.46,18.29 0 bottom
U$76  [PWR2]  20.19,20.19 0 top
U$77  [I_SUPER2_C-()-03]  39.12,19.3 90 bottom
U$78  [32]  41.66,16.51 90 top
U$79  [C0]  36.58,16.51 90 top
U$80  [D1]  39.12,16.51 90 top
U$81  [G3]  44.2,16.51 90 top
U$82  [32]  41.27,16.51 90 bottom
U$83  [C0]  36.58,16.51 90 bottom
U$84  [D1]  39.12,16.51 90 bottom
U$85  [G3]  45.47,16.38 90 bottom
U$86  [LED0]  47.12,19.05 0 bottom
U$87  [SPARKX-TINY]  36.45,21.72 0 top
U$88  [SPARKX-TINY]  45.97,21.59 0 bottom
U$89  [QWIIC_COPYRIGHT_SMALL]  30.23,18.8 90 bottom
U$90  [QWIIC_COPYRIGHT_SMALL]  30.23,18.8 90 bottom
U$91  [CAP1]  44.83,15.88 0 top
U$92  [CAP1]  35.81,17.02 0 bottom
U$93  [DIG0]  44.32,17.14 0 top
U$94  [DIG0]  35.56,18.29 0 bottom
U$95  [PWR2]  42.29,20.19 0 top
U$96  [I_SUPER2_C-()-03]  61.21,19.3 90 bottom
U$97  [32]  63.75,16.51 90 top
U$98  [C0]  58.67,16.51 90 top
U$99  [D1]  61.21,16.51 90 top
U$100  [G3]  66.29,16.51 90 top
U$101  [32]  63.37,16.51 90 bottom
U$102  [C0]  58.67,16.51 90 bottom
U$103  [D1]  61.21,16.51 90 bottom
U$104  [G3]  67.56,16.38 90 bottom
U$105  [LED0]  69.22,19.05 0 bottom
U$106  [SPARKX-TINY]  58.55,21.72 0 top
U$107  [SPARKX-TINY]  68.07,21.59 0 bottom
U$108  [QWIIC_COPYRIGHT_SMALL]  52.32,18.8 90 bottom
U$109  [QWIIC_COPYRIGHT_SMALL]  52.32,18.8 90 bottom
U$110  [CAP1]  66.93,15.88 0 top
U$111  [CAP1]  57.91,17.02 0 bottom
U$112  [DIG0]  66.42,17.14 0 top
U$113  [DIG0]  57.66,18.29 0 bottom
U$114  [PWR2]  64.39,20.19 0 top
U$115  [I_SUPER2_C-()-03]  17.02,27.43 90 bottom
U$116  [32]  19.56,24.64 90 top
U$117  [C0]  14.48,24.64 90 top
U$118  [D1]  17.02,24.64 90 top
U$119  [G3]  22.1,24.64 90 top
U$120  [32]  19.18,24.64 90 bottom
U$121  [C0]  14.48,24.64 90 bottom
U$122  [D1]  17.02,24.64 90 bottom
U$123  [G3]  23.37,24.51 90 bottom
U$124  [LED0]  25.02,27.18 0 bottom
U$125  [SPARKX-TINY]  14.35,29.84 0 top
U$126  [SPARKX-TINY]  23.88,29.72 0 bottom
U$127  [QWIIC_COPYRIGHT_SMALL]  8.13,26.92 90 bottom
U$128  [QWIIC_COPYRIGHT_SMALL]  8.13,26.92 90 bottom
U$129  [CAP1]  22.73,24 0 top
U$130  [CAP1]  13.72,25.15 0 bottom
U$131  [DIG0]  22.23,25.27 0 top
U$132  [DIG0]  13.46,26.42 0 bottom
U$133  [PWR2]  20.19,28.32 0 top
U$134  [I_SUPER2_C-()-03]  39.12,27.43 90 bottom
U$135  [32]  41.66,24.64 90 top
U$136  [C0]  36.58,24.64 90 top
U$137  [D1]  39.12,24.64 90 top
U$138  [G3]  44.2,24.64 90 top
U$139  [32]  41.27,24.64 90 bottom
U$140  [C0]  36.58,24.64 90 bottom
U$141  [D1]  39.12,24.64 90 bottom
U$142  [G3]  45.47,24.51 90 bottom
U$143  [LED0]  47.12,27.18 0 bottom
U$144  [SPARKX-TINY]  36.45,29.84 0 top
U$145  [SPARKX-TINY]  45.97,29.72 0 bottom
U$146  [QWIIC_COPYRIGHT_SMALL]  30.23,26.92 90 bottom
U$147  [QWIIC_COPYRIGHT_SMALL]  30.23,26.92 90 bottom
U$148  [CAP1]  44.83,24 0 top
U$149  [CAP1]  35.81,25.15 0 bottom
U$150  [DIG0]  44.32,25.27 0 top
U$151  [DIG0]  35.56,26.42 0 bottom
U$152  [PWR2]  42.29,28.32 0 top
U$153  [I_SUPER2_C-()-03]  61.21,27.43 90 bottom
U$154  [32]  63.75,24.64 90 top
U$155  [C0]  58.67,24.64 90 top
U$156  [D1]  61.21,24.64 90 top
U$157  [G3]  66.29,24.64 90 top
U$158  [32]  63.37,24.64 90 bottom
U$159  [C0]  58.67,24.64 90 bottom
U$160  [D1]  61.21,24.64 90 bottom
U$161  [G3]  67.56,24.51 90 bottom
U$162  [LED0]  69.22,27.18 0 bottom
U$163  [SPARKX-TINY]  58.55,29.84 0 top
U$164  [SPARKX-TINY]  68.07,29.72 0 bottom
U$165  [QWIIC_COPYRIGHT_SMALL]  52.32,26.92 90 bottom
U$166  [QWIIC_COPYRIGHT_SMALL]  52.32,26.92 90 bottom
U$167  [CAP1]  66.93,24 0 top
U$168  [CAP1]  57.91,25.15 0 bottom
U$169  [DIG0]  66.42,25.27 0 top
U$170  [DIG0]  57.66,26.42 0 bottom
U$171  [PWR2]  64.39,28.32 0 top
U$172  [I_SUPER2_C-()-03]  17.02,35.56 90 bottom
U$173  [32]  19.56,32.77 90 top
U$174  [C0]  14.48,32.77 90 top
U$175  [D1]  17.02,32.77 90 top
U$176  [G3]  22.1,32.77 90 top
U$177  [32]  19.18,32.77 90 bottom
U$178  [C0]  14.48,32.77 90 bottom
U$179  [D1]  17.02,32.77 90 bottom
U$180  [G3]  23.37,32.64 90 bottom
U$181  [LED0]  25.02,35.31 0 bottom
U$182  [SPARKX-TINY]  14.35,37.97 0 top
U$183  [SPARKX-TINY]  23.88,37.85 0 bottom
U$184  [QWIIC_COPYRIGHT_SMALL]  8.13,35.05 90 bottom
U$185  [QWIIC_COPYRIGHT_SMALL]  8.13,35.05 90 bottom
U$186  [CAP1]  22.73,32.13 0 top
U$187  [CAP1]  13.72,33.27 0 bottom
U$188  [DIG0]  22.23,33.4 0 top
U$189  [DIG0]  13.46,34.54 0 bottom
U$190  [PWR2]  20.19,36.45 0 top
U$191  [I_SUPER2_C-()-03]  39.12,35.56 90 bottom
U$192  [32]  41.66,32.77 90 top
U$193  [C0]  36.58,32.77 90 top
U$194  [D1]  39.12,32.77 90 top
U$195  [G3]  44.2,32.77 90 top
U$196  [32]  41.27,32.77 90 bottom
U$197  [C0]  36.58,32.77 90 bottom
U$198  [D1]  39.12,32.77 90 bottom
U$199  [G3]  45.47,32.64 90 bottom
U$200  [LED0]  47.12,35.31 0 bottom
U$201  [SPARKX-TINY]  36.45,37.97 0 top
U$202  [SPARKX-TINY]  45.97,37.85 0 bottom
U$203  [QWIIC_COPYRIGHT_SMALL]  30.23,35.05 90 bottom
U$204  [QWIIC_COPYRIGHT_SMALL]  30.23,35.05 90 bottom
U$205  [CAP1]  44.83,32.13 0 top
U$206  [CAP1]  35.81,33.27 0 bottom
U$207  [DIG0]  44.32,33.4 0 top
U$208  [DIG0]  35.56,34.54 0 bottom
U$209  [PWR2]  42.29,36.45 0 top
U$210  [I_SUPER2_C-()-03]  61.21,35.56 90 bottom
U$211  [32]  63.75,32.77 90 top
U$212  [C0]  58.67,32.77 90 top
U$213  [D1]  61.21,32.77 90 top
U$214  [G3]  66.29,32.77 90 top
U$215  [32]  63.37,32.77 90 bottom
U$216  [C0]  58.67,32.77 90 bottom
U$217  [D1]  61.21,32.77 90 bottom
U$218  [G3]  67.56,32.64 90 bottom
U$219  [LED0]  69.22,35.31 0 bottom
U$220  [SPARKX-TINY]  58.55,37.97 0 top
U$221  [SPARKX-TINY]  68.07,37.85 0 bottom
U$222  [QWIIC_COPYRIGHT_SMALL]  52.32,35.05 90 bottom
U$223  [QWIIC_COPYRIGHT_SMALL]  52.32,35.05 90 bottom
U$224  [CAP1]  66.93,32.13 0 top
U$225  [CAP1]  57.91,33.27 0 bottom
U$226  [DIG0]  66.42,33.4 0 top
U$227  [DIG0]  57.66,34.54 0 bottom
U$228  [PWR2]  64.39,36.45 0 top
U$229  [I_SUPER2_C-()-03]  17.02,43.69 90 bottom
U$230  [32]  19.56,40.89 90 top
U$231  [C0]  14.48,40.89 90 top
U$232  [D1]  17.02,40.89 90 top
U$233  [G3]  22.1,40.89 90 top
U$234  [32]  19.18,40.89 90 bottom
U$235  [C0]  14.48,40.89 90 bottom
U$236  [D1]  17.02,40.89 90 bottom
U$237  [G3]  23.37,40.77 90 bottom
U$238  [LED0]  25.02,43.43 0 bottom
U$239  [SPARKX-TINY]  14.35,46.1 0 top
U$240  [SPARKX-TINY]  23.88,45.97 0 bottom
U$241  [QWIIC_COPYRIGHT_SMALL]  8.13,43.18 90 bottom
U$242  [QWIIC_COPYRIGHT_SMALL]  8.13,43.18 90 bottom
U$243  [CAP1]  22.73,40.26 0 top
U$244  [CAP1]  13.72,41.4 0 bottom
U$245  [DIG0]  22.23,41.53 0 top
U$246  [DIG0]  13.46,42.67 0 bottom
U$247  [PWR2]  20.19,44.58 0 top
U$248  [I_SUPER2_C-()-03]  39.12,43.69 90 bottom
U$249  [32]  41.66,40.89 90 top
U$250  [C0]  36.58,40.89 90 top
U$251  [D1]  39.12,40.89 90 top
U$252  [G3]  44.2,40.89 90 top
U$253  [32]  41.27,40.89 90 bottom
U$254  [C0]  36.58,40.89 90 bottom
U$255  [D1]  39.12,40.89 90 bottom
U$256  [G3]  45.47,40.77 90 bottom
U$257  [LED0]  47.12,43.43 0 bottom
U$258  [SPARKX-TINY]  36.45,46.1 0 top
U$259  [SPARKX-TINY]  45.97,45.97 0 bottom
U$260  [QWIIC_COPYRIGHT_SMALL]  30.23,43.18 90 bottom
U$261  [QWIIC_COPYRIGHT_SMALL]  30.23,43.18 90 bottom
U$262  [CAP1]  44.83,40.26 0 top
U$263  [CAP1]  35.81,41.4 0 bottom
U$264  [DIG0]  44.32,41.53 0 top
U$265  [DIG0]  35.56,42.67 0 bottom
U$266  [PWR2]  42.29,44.58 0 top
U$267  [I_SUPER2_C-()-03]  61.21,43.69 90 bottom
U$268  [32]  63.75,40.89 90 top
U$269  [C0]  58.67,40.89 90 top
U$270  [D1]  61.21,40.89 90 top
U$271  [G3]  66.29,40.89 90 top
U$272  [32]  63.37,40.89 90 bottom
U$273  [C0]  58.67,40.89 90 bottom
U$274  [D1]  61.21,40.89 90 bottom
U$275  [G3]  67.56,40.77 90 bottom
U$276  [LED0]  69.22,43.43 0 bottom
U$277  [SPARKX-TINY]  58.55,46.1 0 top
U$278  [SPARKX-TINY]  68.07,45.97 0 bottom
U$279  [QWIIC_COPYRIGHT_SMALL]  52.32,43.18 90 bottom
U$280  [QWIIC_COPYRIGHT_SMALL]  52.32,43.18 90 bottom
U$281  [CAP1]  66.93,40.26 0 top
U$282  [CAP1]  57.91,41.4 0 bottom
U$283  [DIG0]  66.42,41.53 0 top
U$284  [DIG0]  57.66,42.67 0 bottom
U$285  [PWR2]  64.39,44.58 0 top
U$286  [I_SUPER2_C-()-03]  17.02,51.82 90 bottom
U$287  [32]  19.56,49.02 90 top
U$288  [C0]  14.48,49.02 90 top
U$289  [D1]  17.02,49.02 90 top
U$290  [G3]  22.1,49.02 90 top
U$291  [32]  19.18,49.02 90 bottom
U$292  [C0]  14.48,49.02 90 bottom
U$293  [D1]  17.02,49.02 90 bottom
U$294  [G3]  23.37,48.89 90 bottom
U$295  [LED0]  25.02,51.56 0 bottom
U$296  [SPARKX-TINY]  14.35,54.23 0 top
U$297  [SPARKX-TINY]  23.88,54.1 0 bottom
U$298  [QWIIC_COPYRIGHT_SMALL]  8.13,51.31 90 bottom
U$299  [QWIIC_COPYRIGHT_SMALL]  8.13,51.31 90 bottom
U$300  [CAP1]  22.73,48.39 0 top
U$301  [CAP1]  13.72,49.53 0 bottom
U$302  [DIG0]  22.23,49.66 0 top
U$303  [DIG0]  13.46,50.8 0 bottom
U$304  [PWR2]  20.19,52.7 0 top
U$305  [I_SUPER2_C-()-03]  39.12,51.82 90 bottom
U$306  [32]  41.66,49.02 90 top
U$307  [C0]  36.58,49.02 90 top
U$308  [D1]  39.12,49.02 90 top
U$309  [G3]  44.2,49.02 90 top
U$310  [32]  41.27,49.02 90 bottom
U$311  [C0]  36.58,49.02 90 bottom
U$312  [D1]  39.12,49.02 90 bottom
U$313  [G3]  45.47,48.89 90 bottom
U$314  [LED0]  47.12,51.56 0 bottom
U$315  [SPARKX-TINY]  36.45,54.23 0 top
U$316  [SPARKX-TINY]  45.97,54.1 0 bottom
U$317  [QWIIC_COPYRIGHT_SMALL]  30.23,51.31 90 bottom
U$318  [QWIIC_COPYRIGHT_SMALL]  30.23,51.31 90 bottom
U$319  [CAP1]  44.83,48.39 0 top
U$320  [CAP1]  35.81,49.53 0 bottom
U$321  [DIG0]  44.32,49.66 0 top
U$322  [DIG0]  35.56,50.8 0 bottom
U$323  [PWR2]  42.29,52.7 0 top
U$324  [I_SUPER2_C-()-03]  61.21,51.82 90 bottom
U$325  [32]  63.75,49.02 90 top
U$326  [C0]  58.67,49.02 90 top
U$327  [D1]  61.21,49.02 90 top
U$328  [G3]  66.29,49.02 90 top
U$329  [32]  63.37,49.02 90 bottom
U$330  [C0]  58.67,49.02 90 bottom
U$331  [D1]  61.21,49.02 90 bottom
U$332  [G3]  67.56,48.89 90 bottom
U$333  [LED0]  69.22,51.56 0 bottom
U$334  [SPARKX-TINY]  58.55,54.23 0 top
U$335  [SPARKX-TINY]  68.07,54.1 0 bottom
U$336  [QWIIC_COPYRIGHT_SMALL]  52.32,51.31 90 bottom
U$337  [QWIIC_COPYRIGHT_SMALL]  52.32,51.31 90 bottom
U$338  [CAP1]  66.93,48.39 0 top
U$339  [CAP1]  57.91,49.53 0 bottom
U$340  [DIG0]  66.42,49.66 0 top
U$341  [DIG0]  57.66,50.8 0 bottom
U$342  [PWR2]  64.39,52.7 0 top
U$343  [I_SUPER2_C-()-03]  17.02,59.94 90 bottom
U$344  [32]  19.56,57.15 90 top
U$345  [C0]  14.48,57.15 90 top
U$346  [D1]  17.02,57.15 90 top
U$347  [G3]  22.1,57.15 90 top
U$348  [32]  19.18,57.15 90 bottom
U$349  [C0]  14.48,57.15 90 bottom
U$350  [D1]  17.02,57.15 90 bottom
U$351  [G3]  23.37,57.02 90 bottom
U$352  [LED0]  25.02,59.69 0 bottom
U$353  [SPARKX-TINY]  14.35,62.36 0 top
U$354  [SPARKX-TINY]  23.88,62.23 0 bottom
U$355  [QWIIC_COPYRIGHT_SMALL]  8.13,59.44 90 bottom
U$356  [QWIIC_COPYRIGHT_SMALL]  8.13,59.44 90 bottom
U$357  [CAP1]  22.73,56.51 0 top
U$358  [CAP1]  13.72,57.66 0 bottom
U$359  [DIG0]  22.23,57.78 0 top
U$360  [DIG0]  13.46,58.93 0 bottom
U$361  [PWR2]  20.19,60.83 0 top
U$362  [I_SUPER2_C-()-03]  39.12,59.94 90 bottom
U$363  [32]  41.66,57.15 90 top
U$364  [C0]  36.58,57.15 90 top
U$365  [D1]  39.12,57.15 90 top
U$366  [G3]  44.2,57.15 90 top
U$367  [32]  41.27,57.15 90 bottom
U$368  [C0]  36.58,57.15 90 bottom
U$369  [D1]  39.12,57.15 90 bottom
U$370  [G3]  45.47,57.02 90 bottom
U$371  [LED0]  47.12,59.69 0 bottom
U$372  [SPARKX-TINY]  36.45,62.36 0 top
U$373  [SPARKX-TINY]  45.97,62.23 0 bottom
U$374  [QWIIC_COPYRIGHT_SMALL]  30.23,59.44 90 bottom
U$375  [QWIIC_COPYRIGHT_SMALL]  30.23,59.44 90 bottom
U$376  [CAP1]  44.83,56.51 0 top
U$377  [CAP1]  35.81,57.66 0 bottom
U$378  [DIG0]  44.32,57.78 0 top
U$379  [DIG0]  35.56,58.93 0 bottom
U$380  [PWR2]  42.29,60.83 0 top
U$381  [I_SUPER2_C-()-03]  61.21,59.94 90 bottom
U$382  [32]  63.75,57.15 90 top
U$383  [C0]  58.67,57.15 90 top
U$384  [D1]  61.21,57.15 90 top
U$385  [G3]  66.29,57.15 90 top
U$386  [32]  63.37,57.15 90 bottom
U$387  [C0]  58.67,57.15 90 bottom
U$388  [D1]  61.21,57.15 90 bottom
U$389  [G3]  67.56,57.02 90 bottom
U$390  [LED0]  69.22,59.69 0 bottom
U$391  [SPARKX-TINY]  58.55,62.36 0 top
U$392  [SPARKX-TINY]  68.07,62.23 0 bottom
U$393  [QWIIC_COPYRIGHT_SMALL]  52.32,59.44 90 bottom
U$394  [QWIIC_COPYRIGHT_SMALL]  52.32,59.44 90 bottom
U$395  [CAP1]  66.93,56.51 0 top
U$396  [CAP1]  57.91,57.66 0 bottom
U$397  [DIG0]  66.42,57.78 0 top
U$398  [DIG0]  57.66,58.93 0 bottom
U$399  [PWR2]  64.39,60.83 0 top
U$400  [I_SUPER2_C-()-03]  17.02,68.07 90 bottom
U$401  [32]  19.56,65.28 90 top
U$402  [C0]  14.48,65.28 90 top
U$403  [D1]  17.02,65.28 90 top
U$404  [G3]  22.1,65.28 90 top
U$405  [32]  19.18,65.28 90 bottom
U$406  [C0]  14.48,65.28 90 bottom
U$407  [D1]  17.02,65.28 90 bottom
U$408  [G3]  23.37,65.15 90 bottom
U$409  [LED0]  25.02,67.82 0 bottom
U$410  [SPARKX-TINY]  14.35,70.48 0 top
U$411  [SPARKX-TINY]  23.88,70.36 0 bottom
U$412  [QWIIC_COPYRIGHT_SMALL]  8.13,67.56 90 bottom
U$413  [QWIIC_COPYRIGHT_SMALL]  8.13,67.56 90 bottom
U$414  [CAP1]  22.73,64.64 0 top
U$415  [CAP1]  13.72,65.79 0 bottom
U$416  [DIG0]  22.23,65.91 0 top
U$417  [DIG0]  13.46,67.06 0 bottom
U$418  [PWR2]  20.19,68.96 0 top
U$419  [I_SUPER2_C-()-03]  39.12,68.07 90 bottom
U$420  [32]  41.66,65.28 90 top
U$421  [C0]  36.58,65.28 90 top
U$422  [D1]  39.12,65.28 90 top
U$423  [G3]  44.2,65.28 90 top
U$424  [32]  41.27,65.28 90 bottom
U$425  [C0]  36.58,65.28 90 bottom
U$426  [D1]  39.12,65.28 90 bottom
U$427  [G3]  45.47,65.15 90 bottom
U$428  [LED0]  47.12,67.82 0 bottom
U$429  [SPARKX-TINY]  36.45,70.48 0 top
U$430  [SPARKX-TINY]  45.97,70.36 0 bottom
U$431  [QWIIC_COPYRIGHT_SMALL]  30.23,67.56 90 bottom
U$432  [QWIIC_COPYRIGHT_SMALL]  30.23,67.56 90 bottom
U$433  [CAP1]  44.83,64.64 0 top
U$434  [CAP1]  35.81,65.79 0 bottom
U$435  [DIG0]  44.32,65.91 0 top
U$436  [DIG0]  35.56,67.06 0 bottom
U$437  [PWR2]  42.29,68.96 0 top
U$438  [I_SUPER2_C-()-03]  61.21,68.07 90 bottom
U$439  [32]  63.75,65.28 90 top
U$440  [C0]  58.67,65.28 90 top
U$441  [D1]  61.21,65.28 90 top
U$442  [G3]  66.29,65.28 90 top
U$443  [32]  63.37,65.28 90 bottom
U$444  [C0]  58.67,65.28 90 bottom
U$445  [D1]  61.21,65.28 90 bottom
U$446  [G3]  67.56,65.15 90 bottom
U$447  [LED0]  69.22,67.82 0 bottom
U$448  [SPARKX-TINY]  58.55,70.48 0 top
U$449  [SPARKX-TINY]  68.07,70.36 0 bottom
U$450  [QWIIC_COPYRIGHT_SMALL]  52.32,67.56 90 bottom
U$451  [QWIIC_COPYRIGHT_SMALL]  52.32,67.56 90 bottom
U$452  [CAP1]  66.93,64.64 0 top
U$453  [CAP1]  57.91,65.79 0 bottom
U$454  [DIG0]  66.42,65.91 0 top
U$455  [DIG0]  57.66,67.06 0 bottom
U$456  [PWR2]  64.39,68.96 0 top

## Library data of the parts
D1-D24 = SparkFun-LED; PROD_ID: DIO-00819
E$1-E$4 JP1-JP6 JP8 JP9 JP11-JP14 JP16-JP19 JP21-JP24 JP26-JP29 JP31-JP34 JP36-JP39 JP41-JP44 JP46-JP49 JP51-JP54 JP56-JP59 JP61-JP64 JP66-JP69 JP71-JP74 JP76-JP79 JP81-JP84 JP86-JP89 JP91-JP94 JP96-JP99 JP101-JP104 JP106-JP109 JP111-JP114 JP116-JP119 LOGO1-LOGO24 = SparkFun-Aesthetics
E$5 E$6 = SparkFun-Retired
J1 J6 J9 J12 J15 J18 J21 J24 J27 J30 J33 J36 J39 J42 J45 J48 J51 J54 J57 J60 J63 J66 J69 J72 = Qwiic_Capacitor
J2 J4 J7 J10 J13 J16 J19 J22 J25 J28 J31 J34 J37 J40 J43 J46 J49 J52 J55 J58 J61 J64 J67 J70 = SparkFun-Connectors; PROD_ID: CONN-13694
J3 J5 J8 J11 J14 J17 J20 J23 J26 J29 J32 J35 J38 J41 J44 J47 J50 J53 J56 J59 J62 J65 J68 J71 U$12 U$16 U$30 U$31 U$49 U$50 U$68 U$69 U$87 U$88 U$106 U$107 U$125 U$126 U$144 U$145 U$163 U$164 U$182 U$183 U$201 U$202 U$220 U$221 U$239 U$240 U$258 U$259 U$277 U$278 U$296 U$297 U$315 U$316 U$334 U$335 U$353 U$354 U$372 U$373 U$391 U$392 U$410 U$411 U$429 U$430 U$448 U$449 = SparkX
JP7 JP10 JP15 JP20 JP25 JP30 JP35 JP40 JP45 JP50 JP55 JP60 JP65 JP70 JP75 JP80 JP85 JP90 JP95 JP100 JP105 JP110 JP115 JP120 LED LED1-LED23 = SparkFun-Jumpers
R1 R2 R5 R6 R8 R9 R11 R12 R14 R15 R17 R18 R20 R21 R23 R24 R26 R27 R29 R30 R32 R33 R35 R36 R38 R39 R41 R42 R44 R45 R47 R48 R50 R51 R53 R54 R56 R57 R59 R60 R62 R63 R65 R66 R68 R69 R71 R72 = SparkFun-Resistors; PROD_ID: RES-08272
R3 R4 R7 R10 R13 R16 R19 R22 R25 R28 R31 R34 R37 R40 R43 R46 R49 R52 R55 R58 R61 R64 R67 R70 = SparkFun-Resistors; PROD_ID: RES-07856
U1-U24 = SparkFun-Capacitors
U$1 U$38 U$57 U$76 U$95 U$114 U$133 U$152 U$171 U$190 U$209 U$228 U$247 U$266 U$285 U$304 U$323 U$342 U$361 U$380 U$399 U$418 U$437 U$456 = buzzard_labels (88)
U$2 U$9 U$20 U$21 U$32 U$33 U$39 U$51 U$52 U$58 U$70 U$71 U$77 U$89 U$90 U$96 U$108 U$109 U$115 U$127 U$128 U$134 U$146 U$147 U$153 U$165 U$166 U$172 U$184 U$185 U$191 U$203 U$204 U$210 U$222 U$223 U$229 U$241 U$242 U$248 U$260 U$261 U$267 U$279 U$280 U$286 U$298 U$299 U$305 U$317 U$318 U$324 U$336 U$337 U$343 U$355 U$356 U$362 U$374 U$375 U$381 U$393 U$394 U$400 U$412 U$413 U$419 U$431 U$432 U$438 U$450 U$451 = Labels
U$3-U$8 U$10 U$13 U$14 U$17 U$19 U$24-U$28 U$40-U$47 U$59-U$66 U$78-U$85 U$97-U$104 U$116-U$123 U$135-U$142 U$154-U$161 U$173-U$180 U$192-U$199 U$211-U$218 U$230-U$237 U$249-U$256 U$268-U$275 U$287-U$294 U$306-U$313 U$325-U$332 U$344-U$351 U$363-U$370 U$382-U$389 U$401-U$408 U$420-U$427 U$439-U$446 = buzzard_labels (81)
U$11 U$18 U$22 U$23 U$34-U$37 U$53-U$56 U$72-U$75 U$91-U$94 U$110-U$113 U$129-U$132 U$148-U$151 U$167-U$170 U$186-U$189 U$205-U$208 U$224-U$227 U$243-U$246 U$262-U$265 U$281-U$284 U$300-U$303 U$319-U$322 U$338-U$341 U$357-U$360 U$376-U$379 U$395-U$398 U$414-U$417 U$433-U$436 U$452-U$455 = buzzard_labels (87)
U$15 U$29 U$48 U$67 U$86 U$105 U$124 U$143 U$162 U$181 U$200 U$219 U$238 U$257 U$276 U$295 U$314 U$333 U$352 U$371 U$390 U$409 U$428 U$447 = buzzard_labels (83)

## Nets
3.3V: J2.2 J3.2 JP7.2 LED.2 U1.4
3.3V1: J4.2 J5.2 JP10.2 LED1.2 U2.4
3.3V2: J7.2 J8.2 JP15.2 LED2.2 U3.4
3.3V3: J10.2 J11.2 JP20.2 LED3.2 U4.4
3.3V4: J13.2 J14.2 JP25.2 LED4.2 U5.4
3.3V5: J16.2 J17.2 JP30.2 LED5.2 U6.4
3.3V6: J19.2 J20.2 JP35.2 LED6.2 U7.4
3.3V7: J22.2 J23.2 JP40.2 LED7.2 U8.4
3.3V8: J25.2 J26.2 JP45.2 LED8.2 U9.4
3.3V9: J28.2 J29.2 JP50.2 LED9.2 U10.4
3.3V10: J31.2 J32.2 JP55.2 LED10.2 U11.4
3.3V11: J34.2 J35.2 JP60.2 LED11.2 U12.4
3.3V12: J37.2 J38.2 JP65.2 LED12.2 U13.4
3.3V13: J40.2 J41.2 JP70.2 LED13.2 U14.4
3.3V14: J43.2 J44.2 JP75.2 LED14.2 U15.4
3.3V15: J46.2 J47.2 JP80.2 LED15.2 U16.4
3.3V16: J49.2 J50.2 JP85.2 LED16.2 U17.4
3.3V17: J52.2 J53.2 JP90.2 LED17.2 U18.4
3.3V18: J55.2 J56.2 JP95.2 LED18.2 U19.4
3.3V19: J58.2 J59.2 JP100.2 LED19.2 U20.4
3.3V20: J61.2 J62.2 JP105.2 LED20.2 U21.4
3.3V21: J64.2 J65.2 JP110.2 LED21.2 U22.4
3.3V22: J67.2 J68.2 JP115.2 LED22.2 U23.4
3.3V23: J70.2 J71.2 JP120.2 LED23.2 U24.4
CN: J1.2 U1.3
CN1: J6.2 U2.3
CN2: J9.2 U3.3
CN3: J12.2 U4.3
CN4: J15.2 U5.3
CN5: J18.2 U6.3
CN6: J21.2 U7.3
CN7: J24.2 U8.3
CN8: J27.2 U9.3
CN9: J30.2 U10.3
CN10: J33.2 U11.3
CN11: J36.2 U12.3
CN12: J39.2 U13.3
CN13: J42.2 U14.3
CN14: J45.2 U15.3
CN15: J48.2 U16.3
CN16: J51.2 U17.3
CN17: J54.2 U18.3
CN18: J57.2 U19.3
CN19: J60.2 U20.3
CN20: J63.2 U21.3
CN21: J66.2 U22.3
CN22: J69.2 U23.3
CN23: J72.2 U24.3
CP: J1.1 U1.2
CP1: J6.1 U2.2
CP2: J9.1 U3.2
CP3: J12.1 U4.2
CP4: J15.1 U5.2
CP5: J18.1 U6.2
CP6: J21.1 U7.2
CP7: J24.1 U8.2
CP8: J27.1 U9.2
CP9: J30.1 U10.2
CP10: J33.1 U11.2
CP11: J36.1 U12.2
CP12: J39.1 U13.2
CP13: J42.1 U14.2
CP14: J45.1 U15.2
CP15: J48.1 U16.2
CP16: J51.1 U17.2
CP17: J54.1 U18.2
CP18: J57.1 U19.2
CP19: J60.1 U20.2
CP20: J63.1 U21.2
CP21: J66.1 U22.2
CP22: J69.1 U23.2
CP23: J72.1 U24.2
GND: D1.C J2.1 J3.1 U1.5
GND1: D2.C J4.1 J5.1 U2.5
GND2: D3.C J7.1 J8.1 U3.5
GND3: D4.C J10.1 J11.1 U4.5
GND4: D5.C J13.1 J14.1 U5.5
GND5: D6.C J16.1 J17.1 U6.5
GND6: D7.C J19.1 J20.1 U7.5
GND7: D8.C J22.1 J23.1 U8.5
GND8: D9.C J25.1 J26.1 U9.5
GND9: D10.C J28.1 J29.1 U10.5
GND10: D11.C J31.1 J32.1 U11.5
GND11: D12.C J34.1 J35.1 U12.5
GND12: D13.C J37.1 J38.1 U13.5
GND13: D14.C J40.1 J41.1 U14.5
GND14: D15.C J43.1 J44.1 U15.5
GND15: D16.C J46.1 J47.1 U16.5
GND16: D17.C J49.1 J50.1 U17.5
GND17: D18.C J52.1 J53.1 U18.5
GND18: D19.C J55.1 J56.1 U19.5
GND19: D20.C J58.1 J59.1 U20.5
GND20: D21.C J61.1 J62.1 U21.5
GND21: D22.C J64.1 J65.1 U22.5
GND22: D23.C J67.1 J68.1 U23.5
GND23: D24.C J70.1 J71.1 U24.5
N$1: JP7.3 R1.2
N$2: JP7.1 R2.2
N$3: D1.A R3.1
N$4: LED.1 R3.2
N$5: D2.A R4.1
N$6: JP10.3 R5.2
N$7: JP10.1 R6.2
N$8: LED1.1 R4.2
N$9: D3.A R7.1
N$10: JP15.3 R8.2
N$11: JP15.1 R9.2
N$12: LED2.1 R7.2
N$13: D4.A R10.1
N$14: JP20.3 R11.2
N$15: JP20.1 R12.2
N$16: LED3.1 R10.2
N$17: D5.A R13.1
N$18: JP25.3 R14.2
N$19: JP25.1 R15.2
N$20: LED4.1 R13.2
N$21: D6.A R16.1
N$22: JP30.3 R17.2
N$23: JP30.1 R18.2
N$24: LED5.1 R16.2
N$25: D7.A R19.1
N$26: JP35.3 R20.2
N$27: JP35.1 R21.2
N$28: LED6.1 R19.2
N$29: D8.A R22.1
N$30: JP40.3 R23.2
N$31: JP40.1 R24.2
N$32: LED7.1 R22.2
N$33: D9.A R25.1
N$34: JP45.3 R26.2
N$35: JP45.1 R27.2
N$36: LED8.1 R25.2
N$37: D10.A R28.1
N$38: JP50.3 R29.2
N$39: JP50.1 R30.2
N$40: LED9.1 R28.2
N$41: D11.A R31.1
N$42: JP55.3 R32.2
N$43: JP55.1 R33.2
N$44: LED10.1 R31.2
N$45: D12.A R34.1
N$46: JP60.3 R35.2
N$47: JP60.1 R36.2
N$48: LED11.1 R34.2
N$49: D13.A R37.1
N$50: JP65.3 R38.2
N$51: JP65.1 R39.2
N$52: LED12.1 R37.2
N$53: D14.A R40.1
N$54: JP70.3 R41.2
N$55: JP70.1 R42.2
N$56: LED13.1 R40.2
N$57: D15.A R43.1
N$58: JP75.3 R44.2
N$59: JP75.1 R45.2
N$60: LED14.1 R43.2
N$61: D16.A R46.1
N$62: JP80.3 R47.2
N$63: JP80.1 R48.2
N$64: LED15.1 R46.2
N$65: D17.A R49.1
N$66: JP85.3 R50.2
N$67: JP85.1 R51.2
N$68: LED16.1 R49.2
N$69: D18.A R52.1
N$70: JP90.3 R53.2
N$71: JP90.1 R54.2
N$72: LED17.1 R52.2
N$73: D19.A R55.1
N$74: JP95.3 R56.2
N$75: JP95.1 R57.2
N$76: LED18.1 R55.2
N$77: D20.A R58.1
N$78: JP100.3 R59.2
N$79: JP100.1 R60.2
N$80: LED19.1 R58.2
N$81: D21.A R61.1
N$82: JP105.3 R62.2
N$83: JP105.1 R63.2
N$84: LED20.1 R61.2
N$85: D22.A R64.1
N$86: JP110.3 R65.2
N$87: JP110.1 R66.2
N$88: LED21.1 R64.2
N$89: D23.A R67.1
N$90: JP115.3 R68.2
N$91: JP115.1 R69.2
N$92: LED22.1 R67.2
N$93: D24.A R70.1
N$94: JP120.3 R71.2
N$95: JP120.1 R72.2
N$96: LED23.1 R70.2
SCL: J2.4 J3.4 R2.1 U1.6
SCL1: J4.4 J5.4 R6.1 U2.6
SCL2: J7.4 J8.4 R9.1 U3.6
SCL3: J10.4 J11.4 R12.1 U4.6
SCL4: J13.4 J14.4 R15.1 U5.6
SCL5: J16.4 J17.4 R18.1 U6.6
SCL6: J19.4 J20.4 R21.1 U7.6
SCL7: J22.4 J23.4 R24.1 U8.6
SCL8: J25.4 J26.4 R27.1 U9.6
SCL9: J28.4 J29.4 R30.1 U10.6
SCL10: J31.4 J32.4 R33.1 U11.6
SCL11: J34.4 J35.4 R36.1 U12.6
SCL12: J37.4 J38.4 R39.1 U13.6
SCL13: J40.4 J41.4 R42.1 U14.6
SCL14: J43.4 J44.4 R45.1 U15.6
SCL15: J46.4 J47.4 R48.1 U16.6
SCL16: J49.4 J50.4 R51.1 U17.6
SCL17: J52.4 J53.4 R54.1 U18.6
SCL18: J55.4 J56.4 R57.1 U19.6
SCL19: J58.4 J59.4 R60.1 U20.6
SCL20: J61.4 J62.4 R63.1 U21.6
SCL21: J64.4 J65.4 R66.1 U22.6
SCL22: J67.4 J68.4 R69.1 U23.6
SCL23: J70.4 J71.4 R72.1 U24.6
SDA: J2.3 J3.3 R1.1 U1.1
SDA1: J4.3 J5.3 R5.1 U2.1
SDA2: J7.3 J8.3 R8.1 U3.1
SDA3: J10.3 J11.3 R11.1 U4.1
SDA4: J13.3 J14.3 R14.1 U5.1
SDA5: J16.3 J17.3 R17.1 U6.1
SDA6: J19.3 J20.3 R20.1 U7.1
SDA7: J22.3 J23.3 R23.1 U8.1
SDA8: J25.3 J26.3 R26.1 U9.1
SDA9: J28.3 J29.3 R29.1 U10.1
SDA10: J31.3 J32.3 R32.1 U11.1
SDA11: J34.3 J35.3 R35.1 U12.1
SDA12: J37.3 J38.3 R38.1 U13.1
SDA13: J40.3 J41.3 R41.1 U14.1
SDA14: J43.3 J44.3 R44.1 U15.1
SDA15: J46.3 J47.3 R47.1 U16.1
SDA16: J49.3 J50.3 R50.1 U17.1
SDA17: J52.3 J53.3 R53.1 U18.1
SDA18: J55.3 J56.3 R56.1 U19.1
SDA19: J58.3 J59.3 R59.1 U20.1
SDA20: J61.3 J62.3 R62.1 U21.1
SDA21: J64.3 J65.3 R65.1 U22.1
SDA22: J67.3 J68.3 R68.1 U23.1
SDA23: J70.3 J71.3 R71.1 U24.1